# Allegro board PiMod_MOT_R0A v0.3.brd
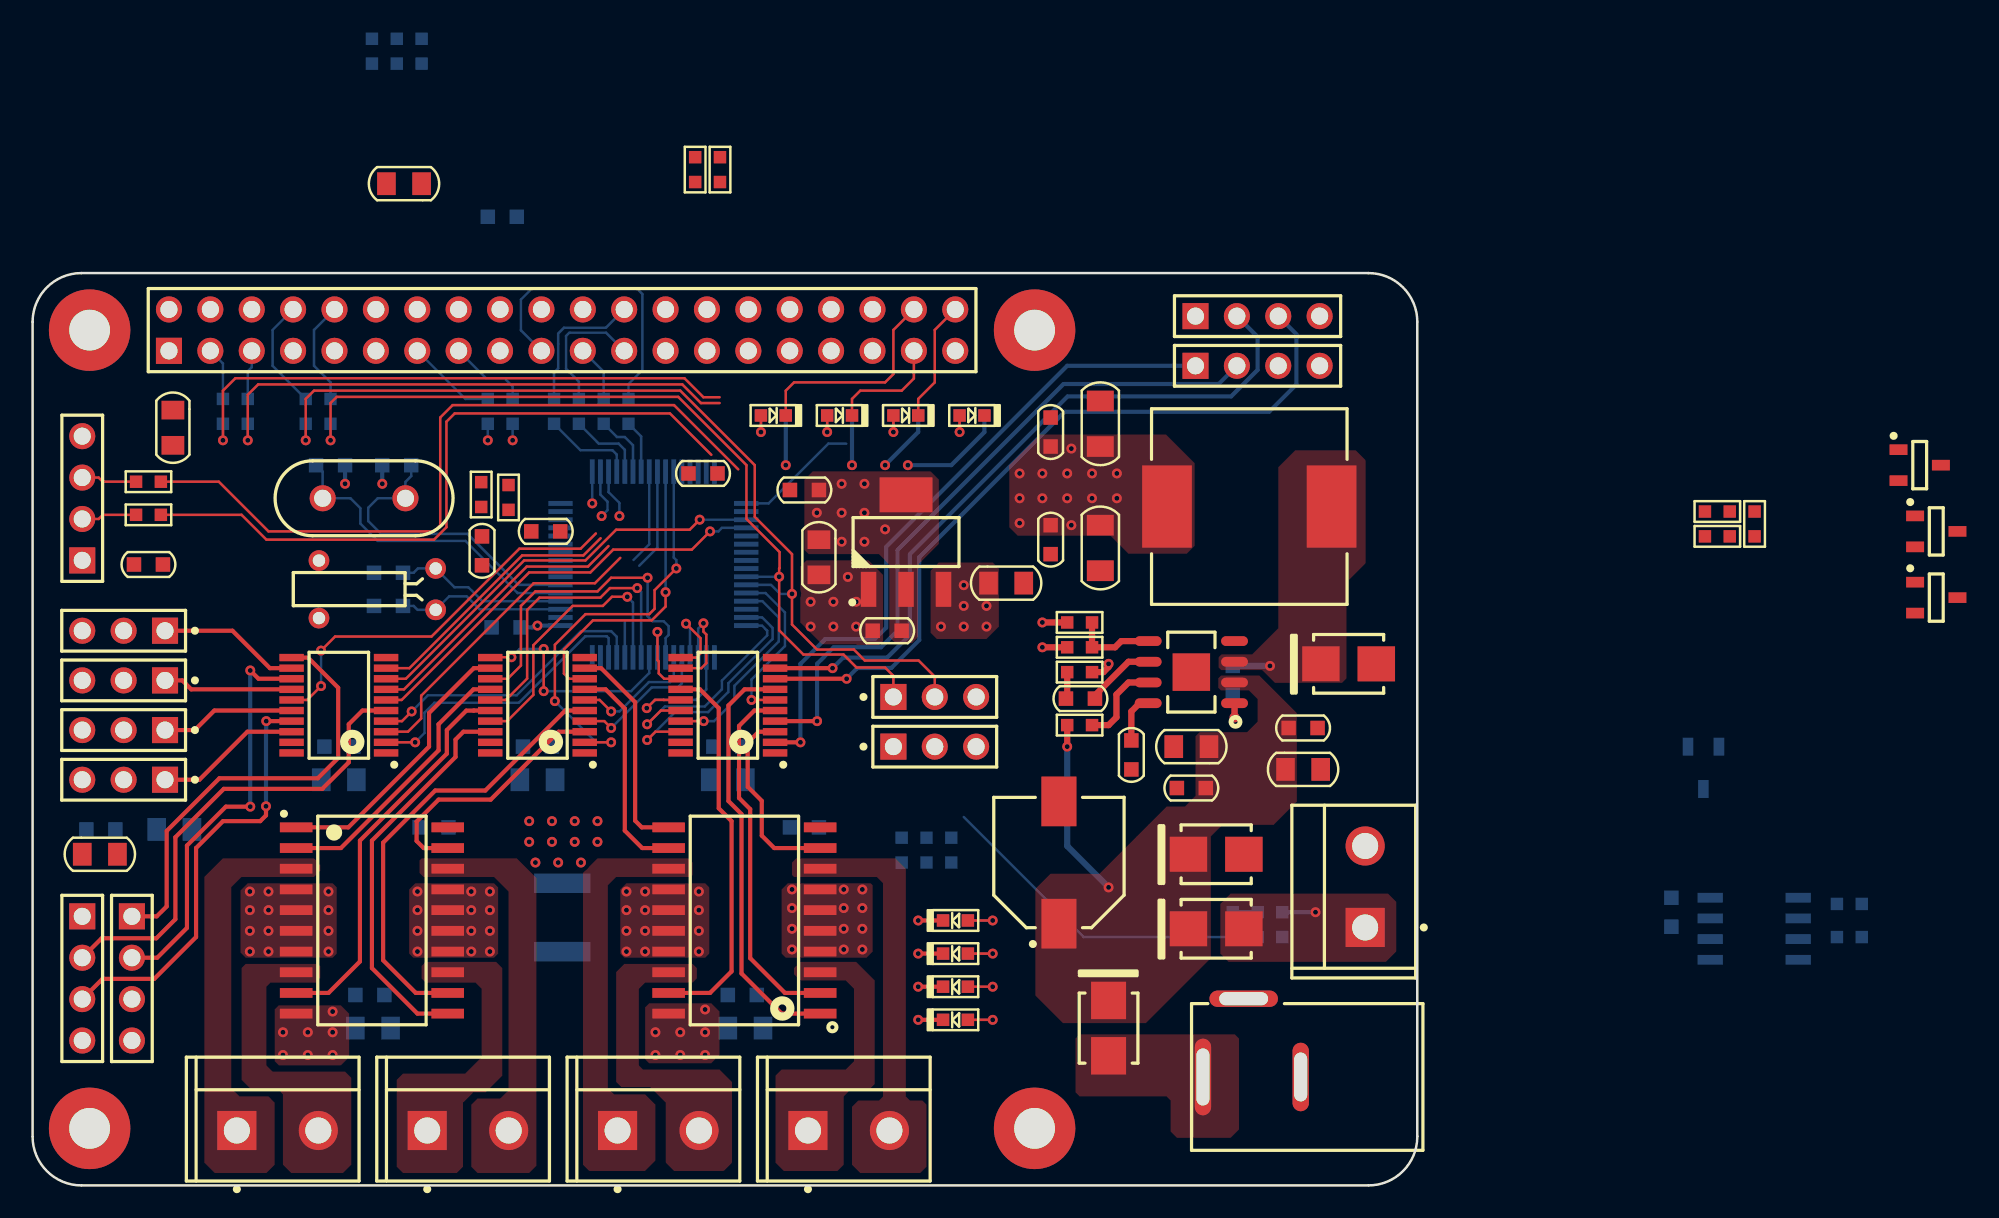
[diagram p0: board, top side]
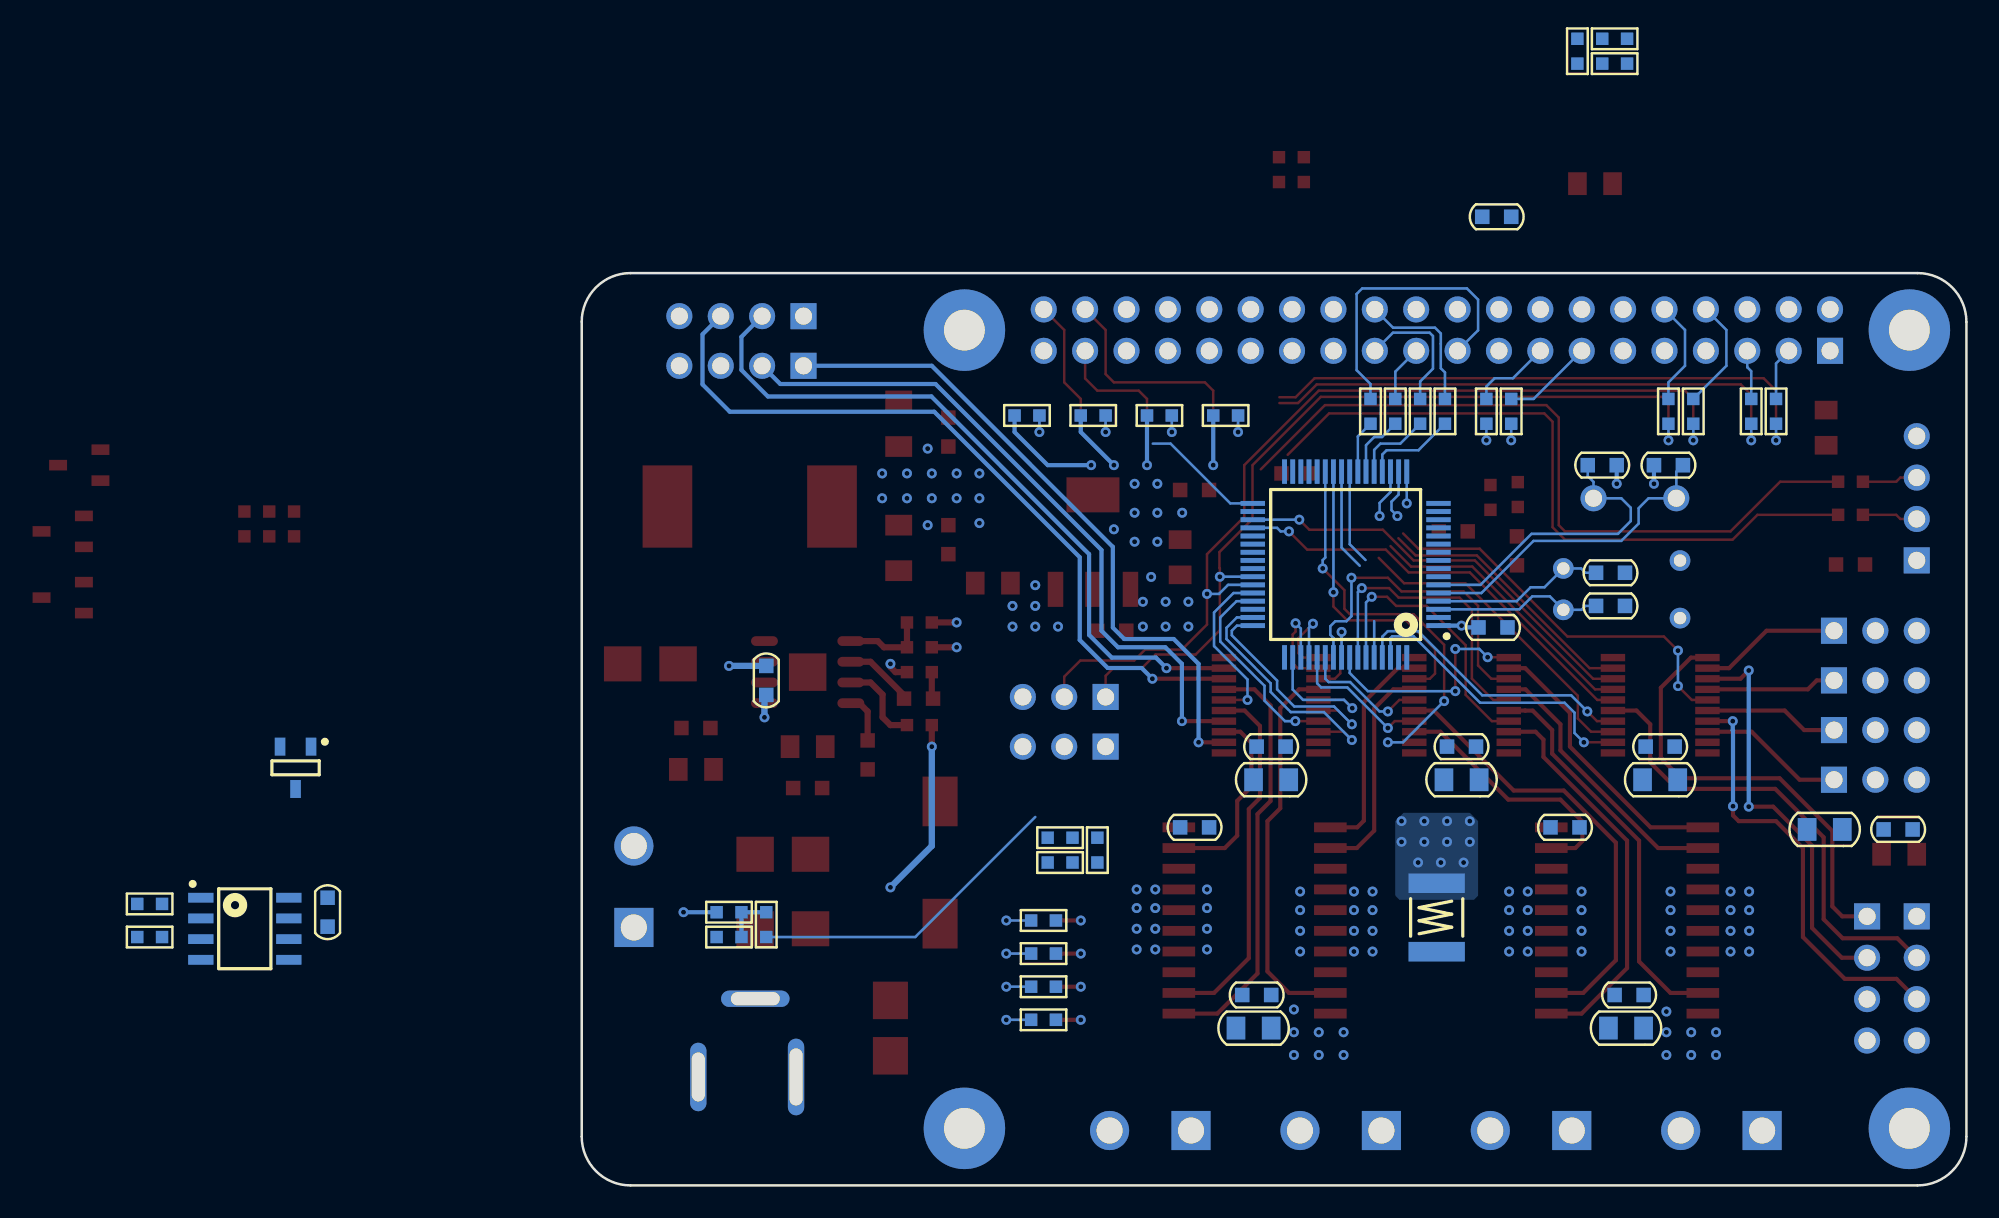
[diagram p1: board, bottom side, seen from below]

Outline 84.99 x 55.98 mm; copper layers: TOP, L2_GND, L3_PWR, BOTTOM. Coordinates in mm from the lower left corner of the outline.
Outline path: 0,52.98 0,3 arc(0.88,0.88) 3,0 81.99,0 arc(84.11,0.88) 84.99,3 84.99,52.98 arc(84.11,55.1) 81.99,55.98 3,55.98 arc(0.88,55.1) 0,52.98

## Placement (name value [footprint] x y rotation side)
BT1  BATTERY  [KF301_2P]  81.79 20.83 180 top
C1  22pF NC  [C0603]  21.84 35.56 90 bottom
C2  0.1uF NC  [C0603]  100.58 16.76 180 bottom
C3  10uF  [C0805]  22.8 61.47 270 top
C4  0.1uF  [C0603]  29.06 34.24 90 bottom
C5  0.1uF  [C0603]  31.5 40.13 270 top
C6  0.1uF  [C0603]  41.15 43.69 270 top
C7  0.1uF  [C0603]  28.83 59.44 270 bottom
C8  0.1uF  [C0603]  7.11 38.1 90 top
C9  22pF NC  [C0603]  21.84 37.59 90 bottom
C10  22pF  [C0603]  18.29 44.2 270 bottom
C11  0.1uF  [C0603]  27.58 38.94 0 top
C12  22pF  [C0603]  22.35 44.2 90 bottom
C13  10uF  [C0805]  30.99 24.89 270 bottom
C14  10uF  [C0805]  18.8 24.89 270 bottom
C15  10uF  [C0805]  42.67 24.89 270 bottom
C16  0.1uF  [C0603]  30.99 26.92 270 bottom
C17  0.1uF  [C0603]  42.67 26.92 270 bottom
C18  0.1uF  [C0603]  18.8 26.92 270 bottom
C19  10uF  [C0805]  43.75 9.65 270 bottom
C20  10uF  [C0805]  20.89 9.65 270 bottom
C21  0.1uF  [C0603]  24.64 21.97 90 bottom
C22  0.1uF  [C0603]  20.7 11.68 270 bottom
C23  0.1uF  [C0603]  43.56 11.68 270 bottom
C24  0.1uF  [C0603]  47.37 21.97 90 bottom
C25  10uF  [C0805]  8.7 21.84 270 bottom
C26  0.1uF  [C0603]  4.19 21.84 90 bottom
C31  0.1uF  [C0603]  73.66 30.99 180 bottom
C32  10uF  [C0805]  71.12 26.92 270 top
C33  10uF  [C0805]  77.98 25.53 90 top
C34  0.1uF  [C0603]  71.12 24.38 270 top
C35  0.1uF  [C0603]  77.98 28.07 90 top
C36  0.1uF  [C0603]  67.44 26.42 180 top
C37  1.5nF  [C0603]  64.31 29.87 90 top
C38  22uF  [C1206]  65.53 46.74 180 top
C39  22uF  [C1206]  65.53 39.12 0 top
C40  0.1uF  [C0603]  62.48 46.23 180 top
C41  0.1uF  [C0603]  62.48 39.62 0 top
C42  330uF NC  [CAP8X8H10]  62.99 19.81 90 top
C43  10uF  [C0805]  59.75 36.96 90 top
C44  10uF  [C0805]  48.26 38.54 0 top
C45  0.1uF  [C0603]  47.37 42.67 270 top
C46  0.1uF  [C0603]  52.45 34.04 270 top
C47  10uF  [C0805]  4.13 20.32 90 top
C48  10uF  [C0805]  8.61 46.49 0 top
D1  BAT54S  [SOT23]  102.55 25.62 270 bottom
D2  BAT54S  [SOT23]  116.84 40.13 0 top
D3  BAT54S  [SOT23]  115.82 44.2 0 top
D4  BAT54S  [SOT23]  116.84 36.07 0 top
D5  SS54  [DO214AA_SMB]  80.77 32 0 top
D6  SS54  [DO214AA_SMB]  66.04 9.65 270 top
D7  SMBJ18CA  [DO214AA_SMB]  72.64 20.32 0 top
D8  SS54  [DO214AA_SMB]  72.64 15.75 0 top
F1  8V 3A  [FUSE1812]  32.51 16.44 270 bottom
J1  RPI CON  [SIP20X2]  8.37 51.21 0 top
J2  SWD_CON  [SIP4]  3.05 38.35 90 top
J3  MCU_USART1  [SIP3]  52.83 29.97 0 top
J4  MCU_USART2  [SIP3]  52.83 26.92 0 top
J5  MOTOR_CON  [KF301_2P]  52.59 3.37 90 top
J6  SERVO_MOT_360D  [SIP3]  8.13 34.04 180 top
J7  SERVO_MOT_180D  [SIP3]  8.13 27.94 180 top
J8  MOTOR_CON  [KF301_2P]  40.9 3.37 90 top
J9  SERVO_MOT_360D  [SIP3]  8.13 30.99 180 top
J10  SERVO_MOT_180D  [SIP3]  8.13 24.89 180 top
J11  MOTOR_CON  [KF301_2P]  17.54 3.37 90 top
J12  MOTOR_CON  [KF301_2P]  29.22 3.37 90 top
J13  ULTRA_SOUND  [SIP4]  71.37 53.34 0 top
J14  ULTRA_SOUND  [SIP4]  3.05 16.51 270 top
J15  SPEED_MON  [SIP4]  71.37 50.29 0 top
J16  SPEED_MON  [SIP4]  6.1 16.51 270 top
L1  6.8uH  [CD127]  74.68 41.66 180 top
LD1  BLUE  [LED0603]  44.7 47.24 0 top
LD2  BLUE  [LED0603]  48.77 47.24 0 top
LD3  BLUE  [LED0603]  52.83 47.24 0 top
LD4  BLUE  [LED0603]  56.9 47.24 0 top
LD5  RED  [LED0603]  57.4 10.16 180 top
LD6  RED  [LED0603]  57.4 14.22 180 top
LD7  RED  [LED0603]  57.4 16.26 180 top
LD8  RED  [LED0603]  57.4 12.19 180 top
P1  DC_JACK_5  [DC005]  77.83 6.65 180 top
R1  0R  [R0603]  18.29 48.26 270 bottom
R2  0R  [R0603]  32 48.26 270 bottom
R3  0R  [R0603]  33.53 48.26 270 bottom
R4  0R  [R0603]  35.05 48.26 270 bottom
R5  0R  [R0603]  36.58 48.26 270 bottom
R6  0R  [R0603]  16.76 48.26 270 bottom
R7  0R  [R0603]  13.21 48.26 270 bottom
R8  0R  [R0603]  11.68 48.26 270 bottom
R9  4.7K  [R0603]  40.67 63.09 270 top
R10  10K NC  [R0603]  112.27 15.24 180 bottom
R11  4.7K  [R0603]  42.19 61.57 90 top
R12  10K NC  [R0603]  112.27 17.27 180 bottom
R13  100R  [R0603]  7.87 41.15 180 top
R14  100R  [R0603]  7.87 43.18 180 top
R15  1K  [R0603]  44.7 47.24 0 bottom
R16  1K  [R0603]  48.77 47.24 0 bottom
R17  1K  [R0603]  52.83 47.24 0 bottom
R18  1K  [R0603]  56.9 47.24 0 bottom
R19  0R  [R0603]  73.66 15.24 90 bottom
R20  0R  [R0603]  53.34 19.81 90 bottom
R21  0R  [R0603]  105.69 39.83 90 top
R22  0R  [R0603]  23.88 68.83 90 bottom
R23  100K NC  [R0603]  63.5 28.24 0 top
R24  52.3K 1%  [R0603]  65.02 34.54 180 top
R25  30K  [R0603]  65.02 31.5 180 top
R26  10K 1%  [R0603]  63.5 33.02 0 top
R27  10K  [R0603]  57.4 10.16 180 bottom
R28  4.7K  [R0603]  57.4 14.22 180 bottom
R29  1K  [R0603]  57.4 16.26 180 bottom
R30  4.7K  [R0603]  57.4 12.19 180 bottom
R32  2K  [R0603]  75.18 16.76 0 bottom
R33  2K  [R0603]  54.86 21.34 0 bottom
R34  10K  [R0603]  104.17 41.35 180 top
R35  10K  [R0603]  22.35 68.83 180 bottom
R36  18K  [R0603]  76.71 15.24 180 bottom
R37  18K  [R0603]  56.39 19.81 180 bottom
R38  10K  [R0603]  102.64 39.83 0 top
R39  10K  [R0603]  20.83 70.36 0 bottom
R40  0R  [R0603]  27.53 43.15 270 top
R41  0R  [R0603]  27.94 48.26 270 bottom
R42  0R  [R0603]  29.46 48.26 270 bottom
R43  10K  [R0603]  29.21 42.98 270 top
TH1  -  [TH2_5]  3.5 3.5 0 top
TH2  -  [TH2_5]  61.5 3.5 0 top
TH3  -  [TH2_5]  3.5 52.48 0 top
TH4  -  [TH2_5]  61.5 52.48 0 top
U1  STM32F030R8  [LQFP64]  38.1 38.1 0 bottom
U2  SN74LVC244APWR  [TSSOP20]  42.67 29.46 180 top
U3  SN74LVC244APWR  [TSSOP20]  30.99 29.46 180 top
U4  SN74LVC244APWR  [TSSOP20]  18.8 29.46 180 top
U5  AT24C02 NC  [SO8]  105.66 15.75 180 bottom
U6  L293DD  [SO20]  43.69 16.26 180 top
U7  L293DD  [SO20]  20.83 16.26 0 top
U8  RT8251GSP  [SO8_EP]  71.12 31.5 180 top
U9  LM1117  [SOT223]  53.61 39.48 90 top
Y1  32.768KHz NC  [XTAL_32KHZ]  24.74 35.32 90 top
Y2  8MHz  [CYST]  17.81 42.16 0 top

## Library data of the parts
BT1 = BATTERY
C1-C10 C12-C26 C47 C48 = CAP NP
C11 C31-C41 C43-C46 = CAP_CE_0603
C42 = CAP
D1-D4 = BAT54S
D5-D8 = DIODE
F1 = FUSE
J1 = HEADER 20X2
J2 = CON_SWD
J3 J4 = HEADER 3
J5 J8 J11 J12 = CON2
J6 J7 J9 J10 = SERVO_MOT
J13-J16 = HEADER 4
L1 = INDUCTOR
LD1-LD8 = LED
P1 = DC_JACK
R1-R30 R32-R43 = R
TH1-TH4 = THROUGH_HOLE
U1 = STM32F030R8
U2-U4 = SN74LVC244APWR
U5 = AT24C512
U6 U7 = L293DD
U8 = RT8251GSP
U9 = LM1117
Y1 Y2 = ZTA

## Footprints (pads in the part's own frame, mm; a bottom-side part is the same pattern mirrored in y, then rotated)
C0603
  rect 0.889x0.889 smd: 1(0,0.889) 2(0,-0.889)
C0805
  rect 1.397x1.143 smd: 1(0,1.079) 2(0,-1.079)
C1206
  rect 1.651x1.27 smd: 1(0,1.397) 2(0,-1.397)
CAP8X8H10
  rect 3.05x2.15 smd: 1(-3.75,0) 2(3.75,0)
CD127
  rect 3.05x5.05 smd: 1(-5.05,0) 2(5.05,0)
CYST
  round 1.6 hole 1.05: 1(0,0) 2(5.08,0)
DC005
  oval 1x4.7 hole 0.8x3.5: 1(6,0)
  oval 1x4.2 hole 0.8x3: 2(0,0)
  oval 4.2x1 hole 3x0.8: 3(3.5,-4.8)
DO214AA_SMB
  rect 2.3x2.15 smd: 1(1.7,0) 2(-1.7,0)
FUSE1812
  rect 1.2x3.45 smd: 1(-2.1,0) 2(2.1,0)
KF301_2P
  rect 2.4x2.4 hole 1.6: 1(0,5)
  round 2.4 hole 1.6: 2(0,0)
LED0603
  rect 0.762x0.762 smd: 1(0,0) 2(1.524,0)
LQFP64
  rect 1.5x0.3 smd: 1(-5.7,3.75) 2(-5.7,3.25) 3(-5.7,2.75) 4(-5.7,2.25) 5(-5.7,1.75) 6(-5.7,1.25) 7(-5.7,0.75) 8(-5.7,0.25) 9(-5.7,-0.25) 10(-5.7,-0.75) 11(-5.7,-1.25) 12(-5.7,-1.75) 13(-5.7,-2.25) 14(-5.7,-2.75) 15(-5.7,-3.25) 16(-5.7,-3.75) 33(5.7,-3.75) 34(5.7,-3.25) 35(5.7,-2.75) 36(5.7,-2.25) 37(5.7,-1.75) 38(5.7,-1.25) 39(5.7,-0.75) 40(5.7,-0.25) 41(5.7,0.25) 42(5.7,0.75) 43(5.7,1.25) 44(5.7,1.75) 45(5.7,2.25) 46(5.7,2.75) 47(5.7,3.25) 48(5.7,3.75)
  rect 0.3x1.5 smd: 17(-3.75,-5.7) 18(-3.25,-5.7) 19(-2.75,-5.7) 20(-2.25,-5.7) 21(-1.75,-5.7) 22(-1.25,-5.7) 23(-0.75,-5.7) 24(-0.25,-5.7) 25(0.25,-5.7) 26(0.75,-5.7) 27(1.25,-5.7) 28(1.75,-5.7) 29(2.25,-5.7) 30(2.75,-5.7) 31(3.25,-5.7) 32(3.75,-5.7) 49(3.75,5.7) 50(3.25,5.7) 51(2.75,5.7) 52(2.25,5.7) 53(1.75,5.7) 54(1.25,5.7) 55(0.75,5.7) 56(0.25,5.7) 57(-0.25,5.7) 58(-0.75,5.7) 59(-1.25,5.7) 60(-1.75,5.7) 61(-2.25,5.7) 62(-2.75,5.7) 63(-3.25,5.7) 64(-3.75,5.7)
R0603
  rect 0.762x0.762 smd: 1(0,0) 2(1.524,0)
SIP3
  rect 1.6x1.6 hole 1.05: 1(0,0)
  round 1.6 hole 1.05: 2(2.54,0) 3(5.08,0)
SIP4
  rect 1.6x1.6 hole 1.05: 1(0,0)
  round 1.6 hole 1.05: 2(2.54,0) 3(5.08,0) 4(7.62,0)
SIP20X2
  rect 1.6x1.6 hole 1.05: 1(0,0)
  round 1.6 hole 1.05: 2(0,2.54) 3(2.54,0) 4(2.54,2.54) 5(5.08,0) 6(5.08,2.54) 7(7.62,0) 8(7.62,2.54) 9(10.16,0) 10(10.16,2.54) 11(12.7,0) 12(12.7,2.54) 13(15.24,0) 14(15.24,2.54) 15(17.78,0) 16(17.78,2.54) 17(20.32,0) 18(20.32,2.54) 19(22.86,0) 20(22.86,2.54) 21(25.4,0) 22(25.4,2.54) 23(27.94,0) 24(27.94,2.54) 25(30.48,0) 26(30.48,2.54) 27(33.02,0) 28(33.02,2.54) 29(35.56,0) 30(35.56,2.54) 31(38.1,0) 32(38.1,2.54) 33(40.64,0) 34(40.64,2.54) 35(43.18,0) 36(43.18,2.54) 37(45.72,0) 38(45.72,2.54) 39(48.26,0) 40(48.26,2.54)
SO8
  rect 1.55x0.6 smd: 1(-2.7,1.905) 2(-2.7,0.635) 3(-2.7,-0.635) 4(-2.7,-1.905) 5(2.7,-1.905) 6(2.7,-0.635) 7(2.7,0.635) 8(2.7,1.905)
SO8_EP
  oval 1.65x0.6 smd: 1(-2.65,1.905) 2(-2.65,0.635) 3(-2.65,-0.635) 4(-2.65,-1.905) 5(2.65,-1.905) 6(2.65,-0.635) 7(2.65,0.635) 8(2.65,1.905)
  rect 2.3x2.3 smd: 9(0,0)
SO20
  rect 2x0.6 smd: 1(-4.65,5.715) 2(-4.65,4.445) 3(-4.65,3.175) 4(-4.65,1.905) 5(-4.65,0.635) 6(-4.65,-0.635) 7(-4.65,-1.905) 8(-4.65,-3.175) 9(-4.65,-4.445) 10(-4.65,-5.715) 11(4.65,-5.715) 12(4.65,-4.445) 13(4.65,-3.175) 14(4.65,-1.905) 15(4.65,-0.635) 16(4.65,0.635) 17(4.65,1.905) 18(4.65,3.175) 19(4.65,4.445) 20(4.65,5.715)
SOT23
  rect 1.1x0.65 smd: 1(-1.3,0.95) 2(-1.3,-0.95) 3(1.3,0)
SOT223
  rect 2.15x0.95 smd: 1(-2.9,2.3) 2(-2.9,0) 3(-2.9,-2.3)
  rect 2.15x3.25 smd: 4(2.9,0)
TH2_5
  round 5 hole 2.5: 1(0,0)
TSSOP20
  rect 1.5x0.45 smd: 1(-2.9,2.925) 2(-2.9,2.275) 3(-2.9,1.625) 4(-2.9,0.975) 5(-2.9,0.325) 6(-2.9,-0.325) 7(-2.9,-0.975) 8(-2.9,-1.625) 9(-2.9,-2.275) 10(-2.9,-2.925) 11(2.9,-2.925) 12(2.9,-2.275) 13(2.9,-1.625) 14(2.9,-0.975) 15(2.9,-0.325) 16(2.9,0.325) 17(2.9,0.975) 18(2.9,1.625) 19(2.9,2.275) 20(2.9,2.925)
XTAL_32KHZ
  round 1.27 hole 0.762: (-0.508,7.163) (3.023,7.163) 1(0,0) 2(2.54,0)

## Nets
GND: BT1.2(-) C1.2 C2.2 C3.2 C4.2 C5.2 C6.2 C7.2 C8.2 C9.2 C10.2 C11.2 C12.2 C13.2 C14.2 C15.2 C16.2 C17.2 C18.2 C19.2 C20.2 C21.2 C22.2 C23.2 C24.2 C25.2 C26.2 C32.2 C33.2 C34.2 C35.2 C36.1 C38.2 C39.2 C40.2 C41.2 C42.2 C43.2 C44.2 C45.2 C46.2 C47.2 C48.2 D1.1 D2.1 D3.1 D4.1 D5.1(A) D7.1(A) J1.6 J1.9 J1.14 J1.20 J1.25 J1.30 J1.34 J1.39 J2.4(GND) J3.3 J4.3 J6.3(GND) J7.3(GND) J9.3(GND) J10.3(GND) J13.4 J14.4 J15.4 J16.4 LD5.2(CATHODE) LD6.2(CATHODE) LD7.2(CATHODE) LD8.2(CATHODE) P1.2(GND1) P1.3(GND2) R11.2 R12.2 R25.1 R26.1 R36.1 R37.1 R38.1 R39.1 U1.12(VSSA) U1.31(VSS#31) U1.63(VSS#63) U2.1(1\O\E\) U2.10(GND) U2.19(2\O\E\) U3.1(1\O\E\) U3.10(GND) U3.19(2\O\E\) U4.1(1\O\E\) U4.10(GND) U4.19(2\O\E\) U5.1(A0) U5.2(A1) U5.4(GND) U6.4(GND#4) U6.5(GND#5) U6.6(GND#6) U6.7(GND#7) U6.14(GND#14) U6.15(GND#15) U6.16(GND#16) U6.17(GND#17) U7.4(GND#4) U7.5(GND#5) U7.6(GND#6) U7.7(GND#7) U7.14(GND#14) U7.15(GND#15) U7.16(GND#16) U7.17(GND#17) U8.4(GND1) U8.9(GND2) U9.1(GND)
VBAT: BT1.1(+) D8.1(A) R32.2
VDD3V3: C2.1 C3.1 C4.1 C5.1 C6.1 C7.1 C8.1 C13.1 C14.1 C15.1 C16.1 C17.1 C18.1 C44.1 C45.1 C46.1 D1.2 D2.2 D3.2 D4.2 J2.1(VCC) R9.1 R10.1 R15.2 R16.2 R17.2 R18.2 R29.2 R35.2 R43.1 U1.1(VBAT/VLCD) U1.13(VDDA) U1.32(VDD#32) U1.64(VDD#64) U2.20(VCC) U3.20(VCC) U4.20(VCC) U5.8(VCC) U9.2(OUT) U9.4(PAD)
VDD5V: C38.1 C39.1 C40.1 C41.1 C43.1 C47.1 C48.1 F1.1 J1.2 J1.4 J13.1 J14.1 J15.3 J16.3 L1.2 R24.2 R28.2 R34.2 U9.3(IN)
VDD12V: C32.1 C33.1 C34.1 C35.1 C42.1 D6.2(K) D7.2(K) D8.2(K) R23.1 R27.2 R33.2 U8.2(VIN)
BOOT0: R9.2 R11.1 U1.60(BOOT0)
FB_5V: R24.1 R26.2 U8.5(FB)
GPIO2: J1.3 R8.1
GPIO3: J1.5 R7.1
GPIO8: J1.24 R2.1
GPIO9: J1.21 R4.1
GPIO10: J1.19 R5.1
GPIO11: J1.23 R3.1
GPIO12: J1.32 R40.1
GPIO14: J1.8 R6.1
GPIO15: J1.10 R1.1
GPIO20: J1.38 LD1.2(CATHODE)
GPIO21: J1.40 LD3.2(CATHODE)
GPIO22: J1.15 R42.1
GPIO26: J1.37 LD2.2(CATHODE)
GPIO27: J1.13 R41.1
ID_SC: J1.28 U5.6(SCL)
ID_SD: J1.27 U5.5(SDA)
ID_WP: R10.2 R12.1 U5.7(WP)
MCU_RST#: C11.1 R40.2 R43.2 U1.7(NRST)
MOT1EN: U2.7(2Y2) U6.1(EN1)
MOT1IN1: U2.5(2Y3) U6.2(IN1)
MOT1IN2: U2.3(2Y4) U6.9(IN2)
MOT1O1: J5.1 U6.3(OUT1)
MOT1O2: J5.2 U6.8(OUT2)
MOT1SPD: J15.1 U2.2(1A1)
MOT2EN: U3.9(2Y1) U6.11(EN2)
MOT2IN1: U3.7(2Y2) U6.12(IN3)
MOT2IN2: U2.14(1Y3) U6.19(IN4)
MOT2O1: J8.1 U6.13(OUT3)
MOT2O2: J8.2 U6.18(OUT4)
MOT2SPD: J15.2 U2.4(1A2)
MOT3EN: U3.12(1Y4) U7.1(EN1)
MOT3IN1: U3.14(1Y3) U7.2(IN1)
MOT3IN2: U3.16(1Y2) U7.9(IN2)
MOT3O1: J11.1 U7.3(OUT1)
MOT3O2: J11.2 U7.8(OUT2)
MOT3SPD: J16.1 U4.11(2A1)
MOT4EN: U3.18(1Y1) U7.11(EN2)
MOT4IN1: U3.5(2Y3) U7.12(IN3)
MOT4IN2: U3.3(2Y4) U7.19(IN4)
MOT4O1: J12.1 U7.13(OUT3)
MOT4O2: J12.2 U7.18(OUT4)
MOT4SPD: J16.2 U4.13(2A2)
PA0: R41.2 U1.14(PA0)
PA1: R42.2 U1.15(PA1)
PA2: J4.1 U1.16(PA2)
PA3: J4.2 U1.17(PA3)
PA4: R2.2 U1.20(PA4)
PA5: R3.2 U1.21(PA5)
PA6: R4.2 U1.22(PA6)
PA7: R5.2 U1.23(PA7)
PA8: U1.41(PA8)
PA9: J3.1 R1.2 U1.42(PA9)
PA10: J3.2 R6.2 U1.43(PA10)
PA11: U1.44(PA11) U2.6(1A3)
PA12: U1.45(PA12) U2.17(2A4)
PA13: R14.1 U1.46(PA13)
PA14: R13.1 U1.49(PA14)
PA15: U1.50(PA15) U2.15(2A3)
PB0: U1.26(PB0) U3.8(1A4)
PB1: U1.27(PB1) U3.2(1A1)
PB2: U1.28(PB2)
PB3: U1.55(PB3) U3.13(2A2)
PB4: U1.56(PB4) U2.13(2A2)
PB5: U1.57(PB5) U3.11(2A1)
PB6: U1.58(PB6) U3.15(2A3)
PB7: U1.59(PB7) U3.17(2A4)
PB8: U1.61(PB8) U4.4(1A2)
PB9: U1.62(PB9) U4.2(1A1)
PB10: R7.2 U1.29(PB10)
PB11: R8.2 U1.30(PB11)
PB12: LD4.2(CATHODE) U1.33(PB12)
PB13: U1.34(PB13)
PB14: U1.35(PB14) U4.8(1A4)
PB15: U1.36(PB15) U4.6(1A3)
PC0: D1.3 R19.1 U1.8(PC0)
PC1: D2.3 R20.1 U1.9(PC1)
PC2: D3.3 R21.1 U1.10(PC2)
PC3: D4.3 R22.1 U1.11(PC3)
PC4: U1.24(PC4)
PC5: U1.25(PC5)
PC6: U1.37(PC6)
PC7: U1.38(PC7)
PC8: U1.39(PC8)
PC9: U1.40(PC9)
PC10: U1.51(PC10) U2.12(1Y4)
PC11: U1.52(PC11) U2.11(2A1)
PC12: U1.53(PC12) U3.4(1A2)
PC13: U1.2(PC13)
PC14: C1.1 U1.3(PC14/OSC32_IN) Y1.1
PC15: C9.1 U1.4(PC15/OSC32_OUT) Y1.2
PD2: U1.54(PD2) U3.6(1A3)
PF0: C10.1 U1.5(PF0/OSC_IN) Y2.1
PF1: C12.1 U1.6(PF1/OSC_OUT) Y2.2
PF4: U1.18(PF4)
PF5: U1.19(PF5)
PF6: U1.47(PF6) U2.18(1Y1)
PF7: U1.48(PF7) U2.16(1Y2)
SERVO1: J6.1(CTL) U4.12(1Y4)
SERVO2: J9.1(CTL) U4.14(1Y3)
SERVO3: J7.1(CTL) U4.16(1Y2)
SERVO4: J10.1(CTL) U4.18(1Y1)
SW_5V: C31.1 D5.2(K) L1.1 U8.3(SW)
SWCLK: J2.2(CLK) R13.2
SWDIO: J2.3(DAT) R14.2
US1_ECHO: J13.3 U2.8(1A4)
US1_TRIG: J13.2 U2.9(2Y1)
US2_ECHO: J14.3 U4.17(2A4)
US2_TRIG: J14.2 U4.5(2Y3)
VEXT: D6.1(A) P1.1(VCC)
VMON_3V3: R22.2 R35.1 R39.2
VMON_5V: R21.2 R34.1 R38.2
VMON_12V: R20.2 R33.1 R37.2
VMON_BAT: R19.2 R32.1 R36.2
VMOT: C19.1 C20.1 C21.1 C22.1 C23.1 C24.1 C25.1 C26.1 F1.2 J6.2(VCC) J7.2(VCC) J9.2(VCC) J10.2(VCC) R30.2 U6.10(VCC) U6.20(VCCIO) U7.10(VCC) U7.20(VCCIO)
N1524440: C36.2 U8.8(SS)
N1524472: C31.2 U8.1(BOOT)
N1524524: C37.2 U8.6(COMP)
N1524544: C37.1 R25.2
N1534047: LD1.1(ANODE) R15.1
N1534057: LD2.1(ANODE) R16.1
N1534067: LD3.1(ANODE) R17.1
N1534077: LD4.1(ANODE) R18.1
N1534958: R23.2 U8.7(EN)
N1536928: LD7.1(ANODE) R29.1
N1537106: LD6.1(ANODE) R28.1
N1537194: LD5.1(ANODE) R27.1
N1538971: LD8.1(ANODE) R30.1
N1643300: U4.15(2A3)
N1643304: U4.9(2Y1)
N1643310: U4.7(2Y2)
N1643314: U4.3(2Y4)

Pads without a net: J1 1 7 11 12 16 17 18 22 26 29 31 33 35 36; TH1 1; TH2 1; TH3 1; TH4 1; U5 3

## Via types
v1: diameter 0.61, hole 0.305, TOP to BOTTOM, 179 vias

## Routing (per net, layer and track width the routed paths; a pad name or vN(x,y) marks a point on that pad's centre or on a via; arc(x,y) is an arc through that point)
GND: length 11.2
  TOP w0.254: LD8.2 v1(54.36,12.19) ; LD5.2 v1(54.36,10.16) ; LD7.2 v1(54.36,16.26) ; LD6.2 v1(54.36,14.22)
  TOP w0.381: R25.1 65.73,31.5 66.04,31.81 v1(66.04,32) ; R26.1 v1(61.98,33.02)
  BOTTOM w0.254: C12.2 v1(21.46,43.05) ; C10.2 v1(19.18,43.05)
  vias: v1(13.34,18.03) v1(13.34,16.89) v1(13.34,15.62) v1(13.34,14.35) v1(14.48,18.03) v1(14.48,16.89) v1(14.48,15.62) v1(14.48,14.35) v1(18.16,18.03) v1(18.16,16.89) v1(18.16,15.62) v1(18.16,14.35) v1(23.62,18.03) v1(23.62,16.89) v1(23.62,15.62) v1(23.62,14.35) v1(26.92,18.03) v1(26.92,16.89) v1(26.92,15.62) v1(26.92,14.35) v1(28.07,18.03) v1(28.07,16.89) v1(28.07,15.62) v1(28.07,14.35) v1(36.45,18.03) v1(36.45,16.89) v1(36.45,15.62) v1(36.45,14.35) v1(37.59,18.03) v1(37.59,16.89) v1(37.59,15.62) v1(37.59,14.35) v1(40.89,18.03) v1(40.89,16.89) v1(40.89,15.62) v1(40.89,14.35) v1(46.61,18.16) v1(46.61,17.02) v1(46.61,15.75) v1(46.61,14.48) v1(47.75,35.81) v1(47.75,34.29) v1(49.15,35.81) v1(49.15,34.29) v1(49.78,18.16) v1(49.78,17.02) v1(49.78,15.75) v1(49.78,14.48) v1(50.04,37.34) v1(50.55,35.81) v1(50.55,34.29) v1(50.93,18.16) v1(50.93,17.02) v1(50.93,15.75) v1(50.93,14.48)
VBAT: length 2
  BOTTOM w0.254: R32.2 v1(78.74,16.76)
VDD3V3: length 19
  BOTTOM w0.254: U1.1 v1(30.99,34.35) 30.79,34.35 30.68,34.24 C4.1 ; v1(52.32,44.2) 54.36,46.23 R17.2 ; R18.2 58.42,46.23 56.39,44.2 v1(53.72,44.2) ; R15.2 v1(46.23,44.2) ; R16.2 v1(50.29,44.2)
  vias: v1(48.13,41.27) v1(49.66,43.05) v1(49.66,41.27) v1(49.66,39.5) v1(51.05,43.05) v1(51.05,41.27) v1(51.05,39.5) v1(52.32,40.26)
VDD5V: length 1.5
  TOP w0.381: R24.2 v1(61.98,34.54)
  vias: v1(30.48,22.35) v1(30.48,21.08) v1(30.86,19.81) v1(31.88,22.35) v1(31.88,21.08) v1(32.26,19.81) v1(33.27,22.35) v1(33.27,21.08) v1(33.66,19.81) v1(34.67,22.35) v1(34.67,21.08) v1(55.75,34.29) v1(57.15,36.83) v1(57.15,35.56) v1(57.15,34.29) v1(58.55,35.56) v1(58.55,34.29) v1(60.58,43.69) v1(60.58,42.16) v1(60.58,40.64) v1(61.98,43.69) v1(61.98,42.16) v1(63.5,43.69) v1(63.5,42.16) v1(63.75,45.21) v1(63.75,40.51) v1(65.02,43.69) v1(65.02,42.16) v1(66.55,43.69) v1(66.55,42.16)
VDD12V: length 11
  TOP w0.381: R23.1 v1(63.5,26.92)
  BOTTOM w0.381: v1(63.5,26.92) 63.5,20.83 v1(66.04,18.29)
BOOT0: length 2.2
  BOTTOM w0.152: U1.60 36.35,34.62
FB_5V: length 5.1
  TOP w0.381: U8.5 66.82,33.4 66.44,33.02 R26.2 R24.1
GPIO2: length 3.3
  BOTTOM w0.152: R8.1 11.68,50.44 J1.3
GPIO3: length 3.1
  BOTTOM w0.152: R7.1 13.21,49.96 13.45,50.21 J1.5
GPIO8: length 8.8
  BOTTOM w0.152: J1.24 35.19,52.63 32.61,52.63 32.26,52.27 32.26,51.64 32.26,50.14 32,49.89 R2.1
GPIO9: length 3.5
  BOTTOM w0.152: R4.1 35.05,49.93 J1.21
GPIO10: length 18.3
  BOTTOM w0.152: J1.19 29.97,52.47 29.97,54.36 30.66,55.04 37.08,55.04 37.43,54.7 37.43,50.03 36.58,49.17 R5.1
GPIO11: length 8.3
  BOTTOM w0.152: J1.23 35.2,52.32 32.94,52.32 32.74,52.12 32.74,50.11 33.53,49.33 R3.1
GPIO14: length 6.9
  BOTTOM w0.152: J1.8 14.73,52.49 14.73,50.29 R6.1
GPIO15: length 6.4
  BOTTOM w0.152: J1.10 17.27,52.49 17.27,50.29 18.29,49.28 R1.1
GPIO20: length 13
  TOP w0.152: J1.38 52.83,52.49 52.83,49.78 52.32,49.28 46.74,49.28 46.23,48.77 LD1.2
GPIO21: length 7.4
  TOP w0.152: LD3.2 54.36,48.26 55.37,49.28 55.37,52.49 J1.40
GPIO22: length 5
  BOTTOM w0.152: R42.1 29.46,49.02 28.96,49.53 27.83,49.53 J1.15
GPIO26: length 7
  TOP w0.152: LD2.2 50.29,48.26 50.8,48.77 53.34,48.77 54.09,49.52 J1.37
GPIO27: length 5.6
  BOTTOM w0.152: J1.13 26.56,48.26 R41.1
MOT1EN: length 25.9
  TOP w0.254: U6.1 45.97,10.54 43.51,13 43.51,22.78 42.71,23.58 42.71,29.45 43.7,30.44 U2.7
MOT1IN1: length 22.3
  TOP w0.254: U6.2 46.18,11.81 44.04,13.94 44.04,23.09 43.36,23.77 43.36,28.19 44.3,29.14 U2.5
MOT1IN2: length 11.9
  TOP w0.254: U2.3 44.56,27.84 43.89,27.17 43.89,24.46 44.75,23.6 44.75,21.46 45.52,20.7 U6.9
MOT1SPD: length 41.1
  TOP w0.254: U2.2 v1(47.13,27.19)
  BOTTOM w0.254: J15.1 63.5,50.29 52.39,39.18 52.39,34.23 51.69,33.53 48.65,33.53 47.13,32 v1(47.13,27.19)
MOT2EN: length 13.5
  TOP w0.254: U6.11 37.39,21.97 36.98,22.38 36.98,29.65 34.9,31.74 U3.9
MOT2IN1: length 13.6
  TOP w0.254: U3.7 35.17,30.44 36.35,29.26 36.35,21.77 37.41,20.7 U6.12
MOT2IN2: length 23.7
  TOP w0.254: U2.14 40.96,30.44 42.11,29.29 42.11,23.14 42.9,22.35 42.9,13.13 41.58,11.81 U6.19
MOT2SPD: length 42.3
  TOP w0.254: U2.4 v1(48.15,28.49)
  BOTTOM w0.254: v1(48.15,28.49) 48.15,32 49.16,33.02 52.07,33.02 53.09,34.04 53.09,38.99 63.27,49.17 72.8,49.17 J15.2
MOT3EN: length 17.2
  TOP w0.254: U3.12 27.08,31.74 24.33,28.99 24.33,26.92 19.38,21.97 U7.1
MOT3IN1: length 16.9
  TOP w0.254: U7.2 18.92,20.7 24.92,26.7 24.92,28.3 27.06,30.44 U3.14
MOT3IN2: length 24.3
  TOP w0.254: U3.16 27.08,29.14 27.08,29.13 26.62,29.13 25.43,27.94 25.43,26.49 20.09,21.16 20.09,13.74 18.16,11.81 U7.9
MOT3SPD: length 27.3
  TOP w0.254: U4.11 16.9,32.39 18.75,30.54 18.75,26.23 17.51,24.98 11.47,24.98 8.23,21.75 8.23,17.12 7.62,16.51 J16.1
MOT4EN: length 24.3
  TOP w0.254: U7.11 23.62,10.54 20.83,13.34 20.83,21.16 25.96,26.29 25.96,27.36 26.44,27.84 U3.18
MOT4IN1: length 27.7
  TOP w0.254: U7.12 23.52,11.81 21.51,13.82 21.51,21.03 24.71,24.23 27.79,24.23 32.69,29.14 U3.5
MOT4IN2: length 15.9
  TOP w0.254: U3.3 32.28,27.84 28.12,23.67 24.92,23.67 23.57,22.33 23.57,21.13 24,20.7 U7.19
MOT4SPD: length 25.2
  TOP w0.254: U4.13 13.87,31.09 v1(13.36,31.6) ; J16.2 7.65,13.97 9.47,15.8 9.47,20.85 11.86,23.24 v1(13.36,23.24)
  BOTTOM w0.254: v1(13.36,31.6) v1(13.36,23.24)
PA0: length 1
  BOTTOM w0.152: R41.2 v1(27.94,45.72)
PA1: length 1
  BOTTOM w0.152: R42.2 v1(29.46,45.72)
PA3: length 1.9
  BOTTOM w0.152: U1.17 v1(34.35,41.85)
PA4: length 5.7
  BOTTOM w0.152: R2.2 33.63,45.11 35.59,45.11 35.85,44.85 U1.20
PA5: length 4.8
  BOTTOM w0.152: R3.2 34.75,45.52 35.97,45.52 36.35,45.13 U1.21
PA6: length 4
  BOTTOM w0.152: R4.2 35.86,45.92 36.35,45.92 36.85,45.42 U1.22
PA7: length 3.3
  BOTTOM w0.152: R5.2 37.35,45.96 U1.23
PA9: length 53.2
  TOP w0.152: v1(18.29,45.72) 18.29,48.01 18.67,48.39 39.62,48.39 43.81,44.2 43.81,40.89 45.85,38.86 45.85,37.89 45.82,37.86 v1(45.82,37.35) 45.82,34.06 47.31,32.58 49.77,32.58 50.57,31.78 52.32,31.78 52.83,31.27 J3.1
  BOTTOM w0.152: R1.2 v1(18.29,45.72) ; U1.42 v1(45.82,37.35)
PA10: length 58.3
  TOP w0.152: J3.2 55.37,31.22 54.38,32.21 51.08,32.21 50.41,32.88 48.15,32.88 46.61,34.42 v1(46.61,36.3) 46.61,38.73 44.32,41.02 44.32,44.2 39.75,48.77 17.27,48.77 16.76,48.26 v1(16.76,45.72)
  BOTTOM w0.152: v1(46.61,36.3) 45.87,36.3 45.32,36.85 U1.43 ; R6.2 v1(16.76,45.72)
PA11: length 10.5
  TOP w0.152: U2.6 v1(44.12,29.79)
  BOTTOM w0.152: U1.44 44.98,36.35 46.18,35.15 46.18,33.1 44.12,31.04 v1(44.12,29.79)
PA12: length 12.5
  TOP w0.152: U2.17 v1(41.19,28.49)
  BOTTOM w0.152: U1.45 44.79,35.85 45.8,34.85 45.8,33.38 43.08,30.66 43.08,29.74 41.82,28.49 v1(41.19,28.49)
PA13: length 45.4
  TOP w0.152: R14.1 11.43,43.18 14.48,40.13 24.64,40.13 25.02,40.51 25.02,47.12 25.78,47.88 39.37,47.88 43.31,43.94
PA14: length 42.5
  TOP w0.152: 41.66,44.83 39.12,47.37 25.91,47.37 25.4,46.86 25.4,40.39 24.64,39.62 14.35,39.62 12.83,41.15 R13.1
PA15: length 8.4
  TOP w0.152: v1(37.69,29.29) 38.2,29.79 38.74,29.79 38.74,29.79 U2.15
  BOTTOM w0.152: U1.50 41.35,30.43 40.72,29.79 38.2,29.79 v1(37.69,29.29)
PB0: length 18.5
  TOP w0.152: U3.8 32.93,31.09 32.61,31.41 32.61,32.89 34.39,34.67 38,34.67 38.85,35.52 v1(38.85,36.4)
  BOTTOM w0.152: U1.26 v1(38.85,36.4)
PB1: length 25.7
  TOP w0.152: U3.2 v1(35.51,27.19) ; v1(39.51,37.86) 38.18,36.53 38.18,35.38 37.85,35.05 33.93,35.05 32.05,33.17 v1(32.05,29.72)
  BOTTOM w0.152: v1(35.51,27.19) 34.58,27.19 v1(32.05,29.72) ; v1(39.51,37.86) 39.51,38.37 39.35,38.53 U1.27
PB3: length 20.3
  TOP w0.152: v1(37.74,37.29) 35.51,37.29 34.67,36.45 30.86,36.45 29.97,35.56 29.97,31.9 29.16,31.09 U3.13
  BOTTOM w0.152: U1.55 38.85,33.59 39.04,33.78 39.04,34.32 38.73,34.62 38.05,34.62 37.74,34.92 v1(37.74,37.29)
PB4: length 5.6
  TOP w0.152: U2.13 38.76,31.09 38.43,31.42 38.43,32.16 38.35,32.24 v1(38.35,33.96)
  BOTTOM w0.152: U1.56 v1(38.35,33.96)
PB5: length 14
  TOP w0.152: U3.11 28.11,32.41 v1(29.39,32.41) ; v1(31.37,30.33) v1(31.37,32.92)
  BOTTOM w0.152: v1(31.37,32.92) 29.9,32.92 v1(29.39,32.41) ; U1.57 37.85,31.44 36.73,30.33 v1(31.37,30.33)
PB6: length 18.7
  TOP w0.152: v1(37.11,36.65) 35.43,36.65 34.85,36.07 31.11,36.07 30.35,35.31 30.35,31.1 29.04,29.79 U3.15
  BOTTOM w0.152: U1.58 37.35,36.41 v1(37.11,36.65)
PB7: length 17.2
  TOP w0.152: v1(36.5,36.12) 35.56,36.12 35,35.56 33.15,35.56 30.73,33.15 30.73,30.1 29.12,28.49 U3.17
  BOTTOM w0.152: U1.59 36.85,35.77 v1(36.5,36.12)
PB8: length 17.9
  TOP w0.152: v1(23.27,29.08) 22.67,28.49 U4.4
  BOTTOM w0.152: v1(23.27,29.08) 24.26,30.07 29.72,30.07 33.66,34.01 35.51,34.01 35.85,33.67 U1.61
PB9: length 18.3
  TOP w0.152: U4.2 v1(23.48,27.19)
  BOTTOM w0.152: U1.62 35.35,33.59 35.24,33.69 33.92,33.69 29.84,29.62 24.66,29.62 24.05,29.01 24.05,27.76 v1(23.48,27.19)
PB10: length 33.5
  TOP w0.152: 42.16,48.01 41.02,48.01 39.88,49.15 13.84,49.15 13.21,48.51 v1(13.21,45.72)
  BOTTOM w0.152: R7.2 v1(13.21,45.72)
PB11: length 35.3
  TOP w0.152: 42.16,48.37 41.17,48.37 40.01,49.53 12.45,49.53 11.68,48.77 v1(11.68,45.72)
  BOTTOM w0.152: R8.2 v1(11.68,45.72)
PB12: length 7.7
  BOTTOM w0.152: U1.33 45.18,41.85 48.84,45.52 49.94,45.52
PB14: length 26.1
  TOP w0.152: v1(40.94,40.85) 40.33,40.23 35.81,40.23 33.93,38.35 30.17,38.35 22.91,31.09 U4.8
  BOTTOM w0.152: U1.35 v1(40.94,40.85)
PB15: length 26.5
  TOP w0.152: U4.6 22.65,29.79 30.48,37.61 34.24,37.61 35.64,39.01 40.46,39.01 v1(41.58,40.13)
  BOTTOM w0.152: v1(41.58,40.13) 42.09,40.13 42.31,40.35 U1.36
PC0: length 19.6
  BOTTOM w0.152: 57.15,22.61 64.52,15.24 R19.1
PC4: length 5.8
  BOTTOM w0.152: 36.88,38.38 37.85,39.34 U1.24
PC5: length 6.2
  BOTTOM w0.152: 37.24,38.02 38.35,39.14 U1.25
PC10: length 6.5
  TOP w0.152: v1(41.17,34.49) 41.17,33.98 41.35,33.8 41.35,32.04 41.05,31.74 U2.12
  BOTTOM w0.152: U1.51 40.85,34.17 v1(41.17,34.49)
PC11: length 5.7
  TOP w0.152: v1(40.11,34.47) 41,33.58 41,32.66 40.73,32.39 U2.11
  BOTTOM w0.152: U1.52 40.35,34.22 v1(40.11,34.47)
PC12: length 8.9
  TOP w0.152: U3.4 35.09,28.49 v1(35.51,28.07)
  BOTTOM w0.152: U1.53 39.85,30.81 39.6,30.56 38,30.56 v1(35.51,28.07)
PC14: length 10.4
  BOTTOM w0.152: C1.1 23.38,35.56 23.63,35.32 Y1.1 25.57,36.14 26.64,36.14 27.44,35.35 U1.3
PC15: length 10.6
  BOTTOM w0.152: C9.1 23.38,37.59 23.65,37.86 Y1.2 25.9,36.7 26.75,36.7 27.6,35.85 U1.4
PD2: length 7.9
  TOP w0.152: v1(35.51,29.08) 34.8,29.79 U3.6
  BOTTOM w0.152: U1.54 39.35,31.09 39.14,30.89 37.82,30.89 36.02,29.08 v1(35.51,29.08)
PF0: length 19.8
  BOTTOM w0.152: C10.1 17.81,43.79 Y2.1 19.51,42.16 20.12,41.55 20.12,40.61 21.18,39.55 26.57,39.55 29.77,36.35 U1.5
PF1: length 18.9
  BOTTOM w0.152: C12.1 23.24,43.53 22.89,43.17 Y2.2 21.18,42.16 20.6,41.58 20.6,40.77 21.39,39.98 26.7,39.98 29.82,36.85 U1.6
PF4: length 3.1
  BOTTOM w0.152: v1(34.92,41.07) 35.29,41.43 35.29,41.95 34.85,42.39 U1.18
PF5: length 3
  BOTTOM w0.152: v1(36.02,41.07) 36.02,41.88 35.35,42.55 U1.19
PF6: length 15.4
  TOP w0.152: U2.18 38.23,27.84 v1(37.72,27.33)
  BOTTOM w0.152: v1(37.72,27.33) 39.43,29.04 41.47,29.04 42.7,30.28 42.7,30.81 45.42,33.53 45.42,34.21 44.78,34.85 U1.47
PF7: length 14
  TOP w0.152: U2.16 38.56,29.14 v1(37.72,28.3)
  BOTTOM w0.152: U1.48 44.77,34.35 45.09,34.04 45.09,33.76 42.31,30.98 42.31,30.44 41.25,29.39 38.81,29.39 v1(37.72,28.3)
SERVO1: length 8.7
  TOP w0.254: J6.1 12.27,34.04 14.57,31.74 U4.12
SERVO2: length 8
  TOP w0.254: J9.1 9.19,30.99 9.73,30.44 U4.14
SERVO3: length 8.3
  TOP w0.254: U4.16 11.16,29.14 9.96,27.94 J7.1
SERVO4: length 9
  TOP w0.254: J10.1 10.24,24.89 13.18,27.84 U4.18
SW_5V: length 2.3
  BOTTOM w0.381: C31.1 v1(75.95,31.88)
SWCLK: length 3.4
  TOP w0.152: J2.2 4.05,40.89 4.31,41.15 R13.2
SWDIO: length 3.4
  TOP w0.152: J2.3 4.05,43.43 4.31,43.18 R14.2
US1_ECHO: length 47.1
  TOP w0.254: U2.8 v1(49.96,31.09)
  BOTTOM w0.254: J13.3 77.57,52.22 77.57,49.15 75.9,47.47 63.35,47.47 54.42,38.54 54.42,33.46 52.7,31.75 50.62,31.75 v1(49.96,31.09)
US1_TRIG: length 43.9
  TOP w0.254: U2.9 v1(49.1,31.74)
  BOTTOM w0.254: J13.2 75.18,52.07 75.18,50.04 73.56,48.41 63.53,48.41 53.85,38.73 53.85,33.78 52.45,32.38 49.74,32.38 v1(49.1,31.74)
US2_ECHO: length 26.5
  TOP w0.254: J14.3 4.29,12.67 7.47,12.67 10.03,15.24 10.03,20.7 11.68,22.35 13.97,22.35 14.33,22.7 v1(14.33,23.27) ; U4.17 v1(14.34,28.49)
  BOTTOM w0.254: v1(14.33,23.27) 14.33,27.91 14.34,27.93 v1(14.34,28.49)
US2_TRIG: length 29.2
  TOP w0.254: J14.2 4.24,15.16 7.59,15.16 8.76,16.33 8.76,21.36 11.73,24.33 17.78,24.33 19.41,25.96 19.41,28.3 20.25,29.14 U4.5
VMON_BAT: length 3
  BOTTOM w0.254: R36.2 R32.1 R19.2
VMOT:
  vias: v1(15.37,9.4) v1(15.37,8) v1(16.89,9.4) v1(16.89,8) v1(18.41,10.67) v1(18.41,9.4) v1(18.41,8) v1(38.23,9.4) v1(38.23,8) v1(39.75,9.4) v1(39.75,8) v1(41.27,10.79) v1(41.27,9.4) v1(41.27,8)
N1524440: length 3
  TOP w0.381: C36.2 67.44,29.08 67.94,29.59 68.47,29.59
N1524472: length 2.3
  TOP w0.381: 73.77,29.59 v1(73.77,28.72)
  BOTTOM w0.381: v1(73.77,28.72) 73.77,29.99 C31.2
N1524524: length 4.3
  TOP w0.381: C37.2 65.2,30.07 67.26,32.13 U8.6
N1524544: length 1.7
  TOP w0.381: R25.2 63.5,29.95 C37.1
N1534047: length 2
  TOP w0.152: LD1.1 v1(44.7,46.23)
  BOTTOM w0.152: v1(44.7,46.23) LD1.1
N1534057: length 2
  TOP w0.152: v1(48.77,46.23) LD2.1
  BOTTOM w0.152: LD2.1 v1(48.77,46.23)
N1534067: length 2
  TOP w0.152: LD3.1 v1(52.83,46.23)
  BOTTOM w0.152: v1(52.83,46.23) LD3.1
N1534077: length 2
  TOP w0.152: v1(56.9,46.23) LD4.1
  BOTTOM w0.152: LD4.1 v1(56.9,46.23)
N1534958: length 5.3
  TOP w0.381: R23.2 66.04,28.24 66.52,28.73 66.52,30.12 67.26,30.86 U8.7
N1536928: length 3
  TOP w0.152: LD7.1 v1(58.93,16.26)
  BOTTOM w0.152: LD7.1 v1(58.93,16.26)
N1537106: length 3
  TOP w0.152: v1(58.93,14.22) LD6.1
  BOTTOM w0.152: LD6.1 v1(58.93,14.22)
N1537194: length 3
  TOP w0.152: v1(58.93,10.16) LD5.1
  BOTTOM w0.152: LD5.1 v1(58.93,10.16)
N1538971: length 3
  TOP w0.152: LD8.1 v1(58.93,12.19)
  BOTTOM w0.152: v1(58.93,12.19) LD8.1
N1643300: length 24.2
  TOP w0.152: v1(17.7,32.82) 18.57,33.68 24.49,33.68 29.87,39.07 33.63,39.07 34.57,40 ; v1(17.7,30.64) 16.85,29.79 U4.15
  BOTTOM w0.152: v1(17.7,30.64) v1(17.7,32.82)
N1643304: length 16.5
  TOP w0.152: U4.9 23.13,31.74 30.05,38.65 33.8,38.65 34.86,39.71
N1643310: length 17.3
  TOP w0.152: 35.34,39.23 34.09,37.97 30.33,37.97 22.79,30.44 U4.7
N1643314: length 19.6
  TOP w0.152: U4.3 23.04,27.84 23.85,28.65 23.85,30.05 30.75,36.95 34.51,36.95 36.07,38.51

## Copper pours and planes (outline as drawn; the poured copper is in the pictures)
GND on TOP: 18.41,18.54 18.67,18.29 18.67,14.22 18.41,13.97 13.08,13.97 12.76,14.29 12.76,18.1 13.21,18.54
GND on TOP: 28.32,18.54 28.57,18.29 28.57,14.22 28.32,13.97 23.37,13.97 23.11,14.22 23.11,18.16 23.5,18.54
GND on TOP: 47.5,38.35 51.31,38.35 52.2,37.47 52.2,33.4 51.94,33.15 48.51,33.15 47.12,34.54 47.12,37.97
GND on TOP: 41.27,18.54 41.53,18.29 41.53,14.22 41.27,13.97 36.32,13.97 36.07,14.22 36.07,18.16 36.45,18.54
GND on TOP: 46.23,13.97 45.97,14.22 45.97,18.16 46.35,18.54 51.44,18.54 51.56,18.41 51.56,14.35 51.18,13.97
GND on L2_GND: 3,0.76 1.42,1.42 0.76,3 0.76,52.98 1.42,54.56 3,55.22 81.99,55.22 83.57,54.56 84.23,52.98 84.23,3 83.57,1.42 81.99,0.76
VBAT on TOP: 73.53,17.91 83.19,17.91 83.69,17.4 83.69,14.35 83.06,13.72 73.41,13.72 72.9,14.22 72.9,17.27
VDD3V3 on TOP: 47.88,43.81 55.12,43.81 55.63,43.31 55.63,39.37 54.36,38.1 54.36,33.66 53.98,33.27 52.96,33.27 52.58,33.66 52.58,38.1 51.94,38.73 47.62,38.73 47.37,38.99 47.37,43.31
VDD3V3 on L3_PWR: 14.1,23.83 14.1,36.55 0.76,36.55 0.76,44.65 54.18,44.65 54.18,23.83
VDD5V on TOP: 61.82,46.08 69.57,46.08 71.32,44.32 71.32,39.24 70.84,38.76 67.26,38.76 66.15,39.87 60.46,39.87 59.94,40.39 59.94,44.2
VDD5V on TOP: 55.63,38.23 58.93,38.23 59.31,37.85 59.31,34.29 58.55,33.53 55.5,33.53 55.12,33.91 55.12,37.72
VDD5V on BOTTOM: 29.97,22.35 29.97,17.78 30.23,17.53 34.8,17.53 35.05,17.78 35.05,22.35 34.54,22.86 30.48,22.86
VDD5V on L3_PWR: 3,0.76 1.42,1.42 0.76,3 0.76,35.79 13.34,35.79 13.34,23.06 54.94,23.06 54.94,45.42 0.76,45.42 0.76,52.98 1.42,54.56 3,55.22 81.99,55.22 83.57,54.56 84.23,52.98 84.23,3 83.57,1.42 81.99,0.76
VDD12V on TOP: 72.95,31.29 75.29,31.29 77.6,28.98 77.6,23.55 76.17,22.12 73.03,22.12 72.31,21.41 72.31,14 72.34,13.97 68.33,9.96 63.25,9.96 61.54,11.66 61.54,18.19 62.48,19.13 65.48,19.13 69.61,23.25 70.73,23.25 71.37,23.9 71.37,27.56 71.63,27.81 74.55,27.81 75.18,28.45 75.18,29.84 74.65,30.38 72.92,30.38 72.77,30.53 72.77,31.11
MOT1O1 on TOP: 47.12,12.57 49.91,12.57 50.42,12.06 50.42,7.62 49.91,7.11 45.97,7.11 45.59,6.73 45.59,1.4 46.1,0.89 49.4,0.89 49.78,1.27 49.78,5.46 50.16,5.84 51.31,5.84 51.69,6.22 51.69,12.57 50.55,13.72 47.12,13.72 46.74,13.34 46.74,12.95
MOT1O2 on TOP: 51.82,18.92 46.74,18.92 46.61,19.05 46.61,19.81 46.86,20.07 52.96,20.07 53.59,19.43 53.59,5.46 53.85,5.21 54.61,5.21 54.86,4.95 54.86,1.14 54.48,0.76 53.85,0.76 51.56,0.76 50.8,0.76 50.29,1.27 50.29,4.83 50.67,5.21 51.94,5.21 52.2,5.46 52.2,18.54
MOT2O1 on TOP: 40.26,20.07 40.51,19.81 40.51,19.05 40.39,18.92 35.81,18.92 35.31,18.41 35.31,5.97 35.69,5.59 37.59,5.59 38.23,4.95 38.23,1.52 37.59,0.89 34.16,0.89 33.78,1.27 33.78,19.18 34.67,20.07
MOT2O2 on TOP: 36.32,13.59 40.51,13.59 40.77,13.34 40.77,12.7 40.51,12.45 37.59,12.45 37.21,12.06 37.21,7.37 37.47,7.11 42.16,7.11 42.93,6.35 42.93,1.4 42.42,0.89 39.37,0.89 38.86,1.4 38.86,5.08 37.91,6.03 36.13,6.03 35.81,6.35 35.81,13.08
MOT3O1 on TOP: 11.18,0.76 10.54,1.4 10.54,18.92 11.68,20.07 17.27,20.07 17.65,19.68 17.65,19.3 17.27,18.92 12.83,18.92 12.19,18.29 12.19,5.97 12.7,5.46 14.48,5.46 14.86,5.08 14.86,1.27 14.35,0.76
MOT3O2 on TOP: 15.87,0.76 15.37,1.27 15.37,5.59 15.11,5.84 13.46,5.84 12.83,6.48 12.83,13.34 13.08,13.59 17.53,13.59 17.65,13.46 17.65,12.7 17.4,12.45 14.61,12.45 14.35,12.19 14.35,7.37 14.73,6.99 19.18,6.99 19.56,6.6 19.56,1.27 19.05,0.76
MOT4O1 on TOP: 22.73,0.76 22.35,1.14 22.35,6.48 22.73,6.86 26.54,6.86 27.56,7.87 27.56,12.06 27.18,12.45 24.13,12.45 23.88,12.7 23.88,13.46 24.13,13.72 28.45,13.72 28.83,13.34 28.83,6.73 27.81,5.71 27.05,5.71 26.42,5.08 26.42,1.14 26.04,0.76
MOT4O2 on TOP: 28.7,5.33 29.21,5.84 29.21,18.03 28.32,18.92 24,18.92 23.75,19.18 23.75,19.94 23.88,20.07 29.72,20.07 30.92,18.86 30.92,1.21 30.48,0.76 27.3,0.76 26.92,1.14 26.92,4.95 27.3,5.33
SW_5V on TOP: 74.85,32.59 72.97,32.59 72.8,32.41 72.8,31.78 72.95,31.62 75.46,31.62 76.25,30.84 80.37,30.84 80.64,31.11 80.64,37.01 81.81,38.18 81.81,44.5 81.2,45.11 77.5,45.11 76.45,44.07 76.45,34.19
VEXT on TOP: 64.26,9.27 73.79,9.27 74.04,9.02 74.04,3.43 73.53,2.92 70.23,2.92 69.85,3.3 69.85,5.21 69.6,5.46 64.26,5.46 64.01,5.71 64.01,9.02
VMOT on TOP: 15.11,11.05 18.92,11.05 19.43,10.54 19.43,7.87 18.92,7.37 15.11,7.37 14.86,7.62 14.86,10.79
VMOT on TOP: 37.85,11.18 41.66,11.18 42.16,10.67 42.16,8 41.66,7.49 37.85,7.49 37.59,7.75 37.59,10.92
